# Allegro board HEAD.brd
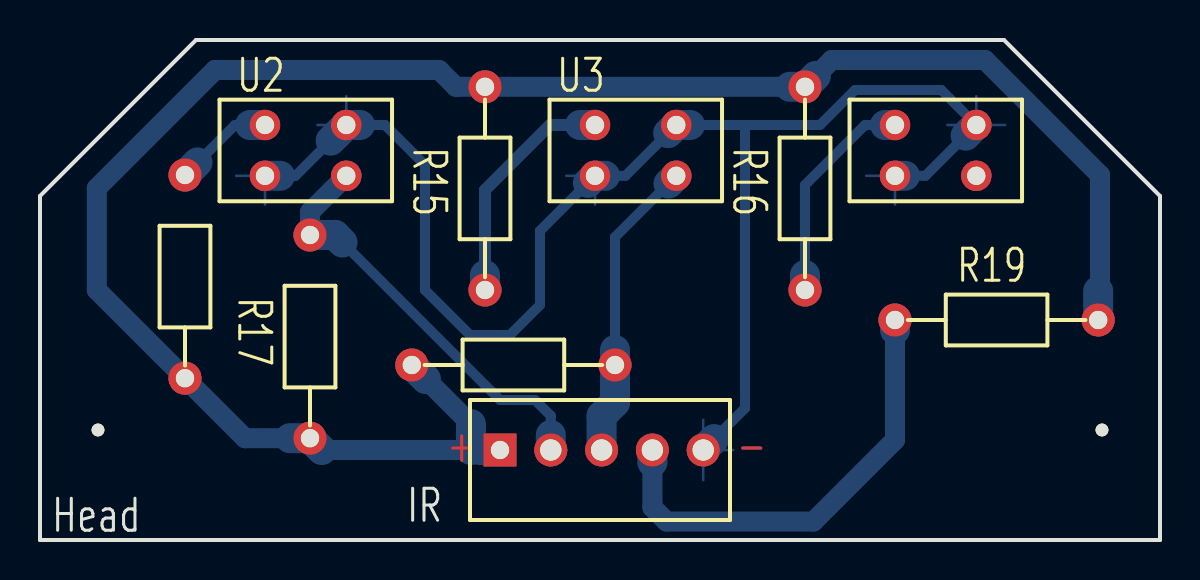
[diagram p0: board, top side]
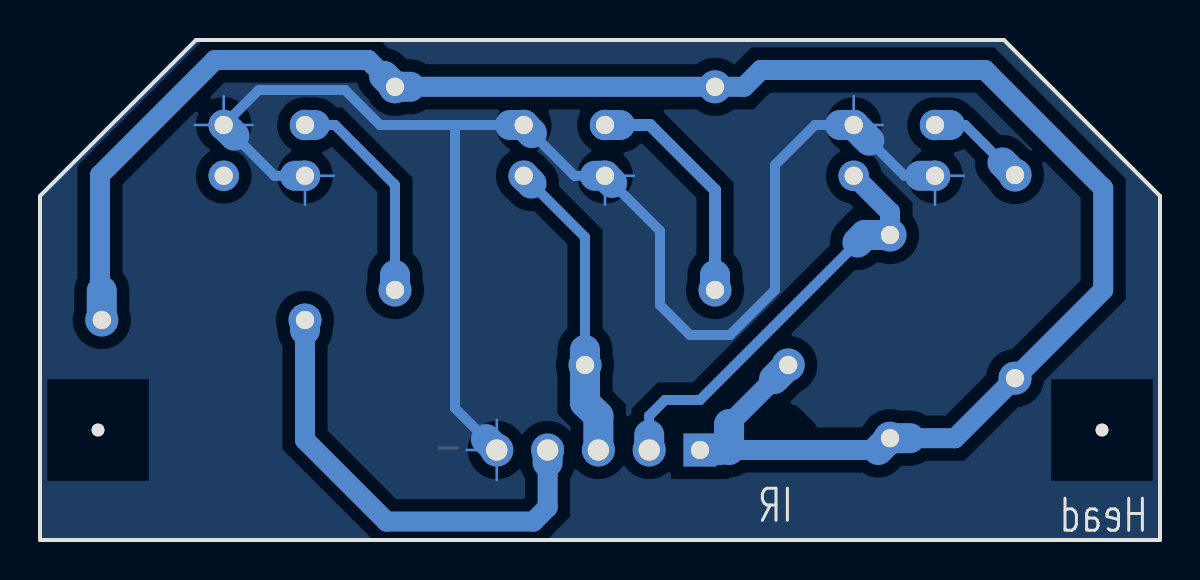
[diagram p1: board, bottom side, seen from below]

Outline 56 x 25 mm; copper layers: TOP, BOTTOM. Coordinates in mm from the lower left corner of the outline.
Outline path: 0,17.2 7.8,25 48.2,25 56,17.2 56,0 0,0 0,17.2

## Placement (name value [footprint] x y rotation side)
J4  5_pins_180_degrees  [HEADER_5]  23 4.5 0 top
NOREF  -  [unnamed]  2.9 5.5 0 top
NOREF#2  -  [unnamed]  53.1 5.5 0 top
R14  220R  [ODPOR]  7.25 18.25 270 top
R15  220R  [ODPOR]  22.25 12.5 90 top
R16  220R  [ODPOR]  38.25 12.5 90 top
R17  33k  [ODPOR]  13.5 15.25 270 top
R18  33k  [ODPOR]  28.75 8.75 180 top
R19  33k  [ODPOR]  42.75 11 0 top
U2  LTH1550-1  [LTH_1550-01]  11.25 20.75 0 top
U3  LTH1550-1  [LTH_1550-01]  27.75 20.75 0 top
U4  LTH1550-1  [LTH_1550-01]  42.75 20.75 0 top

## Library data of the parts
J4 = CONN PCB 5
R14-R19 = R
U2-U4 = OPTO ISOLATOR_3

## Footprints (pads in the part's own frame, mm; a bottom-side part is the same pattern mirrored in y, then rotated)
HEADER_5
  rect 1.651x1.651 hole 0.914: 1(0,0)
  round 1.651 hole 1.067: 2(2.54,0) 3(5.08,0) 4(7.62,0) 5(10.16,0)
LTH_1550-01
  round 1.524 hole 0.914: 1(0,0) 2(0,-2.54) 3(4.064,0) 4(4.064,-2.54)
ODPOR
  round 1.651 hole 0.914: 1(0,0) 2(10.16,0)
unnamed
  round 0.635 hole 3.175 unplated: (0,0)

## Nets
GND: J4.5 U2.2(ANODE) U2.3(EMITTER) U3.2(ANODE) U3.3(EMITTER) U4.2(ANODE) U4.3(EMITTER)
N08367: R14.1 U2.1(CATHODE)
N08419: J4.3 R18.1 U3.4(COLLECTOR)
N08431: J4.4 R19.1 U4.4(COLLECTOR)
N08509: J4.1 R14.2 R15.2 R16.2 R17.2 R18.2 R19.2
N08533: R16.1 U4.1(CATHODE)
N08539: R15.1 U3.1(CATHODE)
N08603: J4.2 R17.1 U2.4(COLLECTOR)

## Routing (per net, layer and track width the routed paths; a pad name or vN(x,y) marks a point on that pad's centre or on a via; arc(x,y) is an arc through that point)
GND: length 95.2
  BOTTOM w0.127: 11.25,16.77 U2.2 9.81,18.21 ; 45.37,20.75 U4.3 ; U4.3 46.81,22.19 ; U4.3 48.26,20.75 ; 13.87,20.75 U2.3 15.31,22.19 ; J4.5 34.67,4.5 ; J4.5 33.16,2.99 ; J4.5 33.16,6.01 ; 27.75,16.77 U3.2 26.31,18.21 ; 41.31,18.21 U4.2 42.75,16.77
  BOTTOM w0.5: 28.25,18.21 29.27,18.21 31.41,20.34 ; 43.25,18.21 44.27,18.21 46.28,20.22 ; 14.53,19.97 12.77,18.21 12,18.21 ; 16,20.75 17.25,20.75 19.25,18.75 19.25,12.5 21.5,10.25 23.5,10.25 25,11.75 25,15.46 27.39,17.86 ; 33.7,5.04 35.25,6.59 35.25,20.75 ; U4.3 45.06,22.5 40.75,22.5 39,20.75 35.25,20.75 ; 35.25,20.75 32.5,20.75
  BOTTOM w1.5: U4.3 46.28,20.22 ; 33.7,5.04 J4.5 ; 43.25,18.21 U4.2 ; 27.39,17.86 U3.2 28.25,18.21 ; 14.53,19.97 U2.3 16,20.75 ; U2.2 12,18.21 ; 31.41,20.34 U3.3 32.5,20.75
N08367: length 5
  BOTTOM w0.5: 10.5,20.75 9.75,20.75 7.88,18.88
  BOTTOM w1.5: U2.1 10.5,20.75 ; 7.88,18.88 R14.1
N08419: length 15.3
  BOTTOM w0.5: 31.43,17.82 28.75,15.15 28.75,9.5
  BOTTOM w1.5: 31.43,17.82 U3.4 ; 28.75,9.5 R18.1 28.75,6.87 28.08,6.2 J4.3
N08431: length 23
  BOTTOM w1: 42.75,10.5 42.75,5 38.67,0.92 31.33,0.92 30.62,1.63 30.62,3.88
  BOTTOM w1.5: R19.1 42.75,10.5 ; 30.62,3.88 J4.4
N08509: length 97.2
  BOTTOM w1: 21.55,5.79 19.3,8.04 ; 52.91,12.45 53,12.54 53,18.25 47.25,24 39.59,24 38.8,23.2 ; 14.09,4.5 22,4.5 ; 12.5,5.09 10.25,5.09 R14.2 2.84,12.5 2.84,17.59 8.75,23.5 19.96,23.5 20.8,22.66 R15.2 37.5,22.66
  BOTTOM w1.5: 37.5,22.66 R16.2 38.8,23.2 ; 52.91,12.45 R19.2 ; 22,4.5 J4.1 ; 14.09,4.5 R17.2 12.5,5.09 ; 21.55,4.5 21.55,5.79 ; 19.3,8.04 R18.2
N08533: length 11
  BOTTOM w0.5: 38.25,13.25 38.25,17.75 41.25,20.75 42.25,20.75
  BOTTOM w1.5: 38.25,13.25 R16.1 ; U4.1 42.25,20.75
N08539: length 11.8
  BOTTOM w0.6: 27,20.75 25.5,20.75 22.25,17.5 22.25,13.25
  BOTTOM w1.5: R15.1 22.25,13.25 ; 27,20.75 U3.1
N08603: length 21.2
  BOTTOM w0.5: 15.12,14.88 23,7 24.75,7 25.54,6.21 25.54,5.25
  BOTTOM w1: R17.1 13.5,16.4 U2.4
  BOTTOM w1.5: 15.12,14.88 14.75,15.25 R17.1 ; J4.2 25.54,5.25

## Copper pours and planes (outline as drawn; the poured copper is in the pictures)
GND on BOTTOM: 0,0.25 0,17.25 7.75,25 48.25,25 56,17.25 56,0 -0.25,0 ; 1 cut-out

## Text on the board
Board Geometry/Outline: Head | IR
TOP: + | -
